# Altium PCB Zigbee控制板.PcbDoc
Units mm, origin at the board's own origin, x right, y up, seen from the top; angles counter-clockwise.
Board outline 100 x 75 mm, 2 copper layers (Top Layer, Bottom Layer); 54 components, 41 nets, 171 pads, 48 vias.
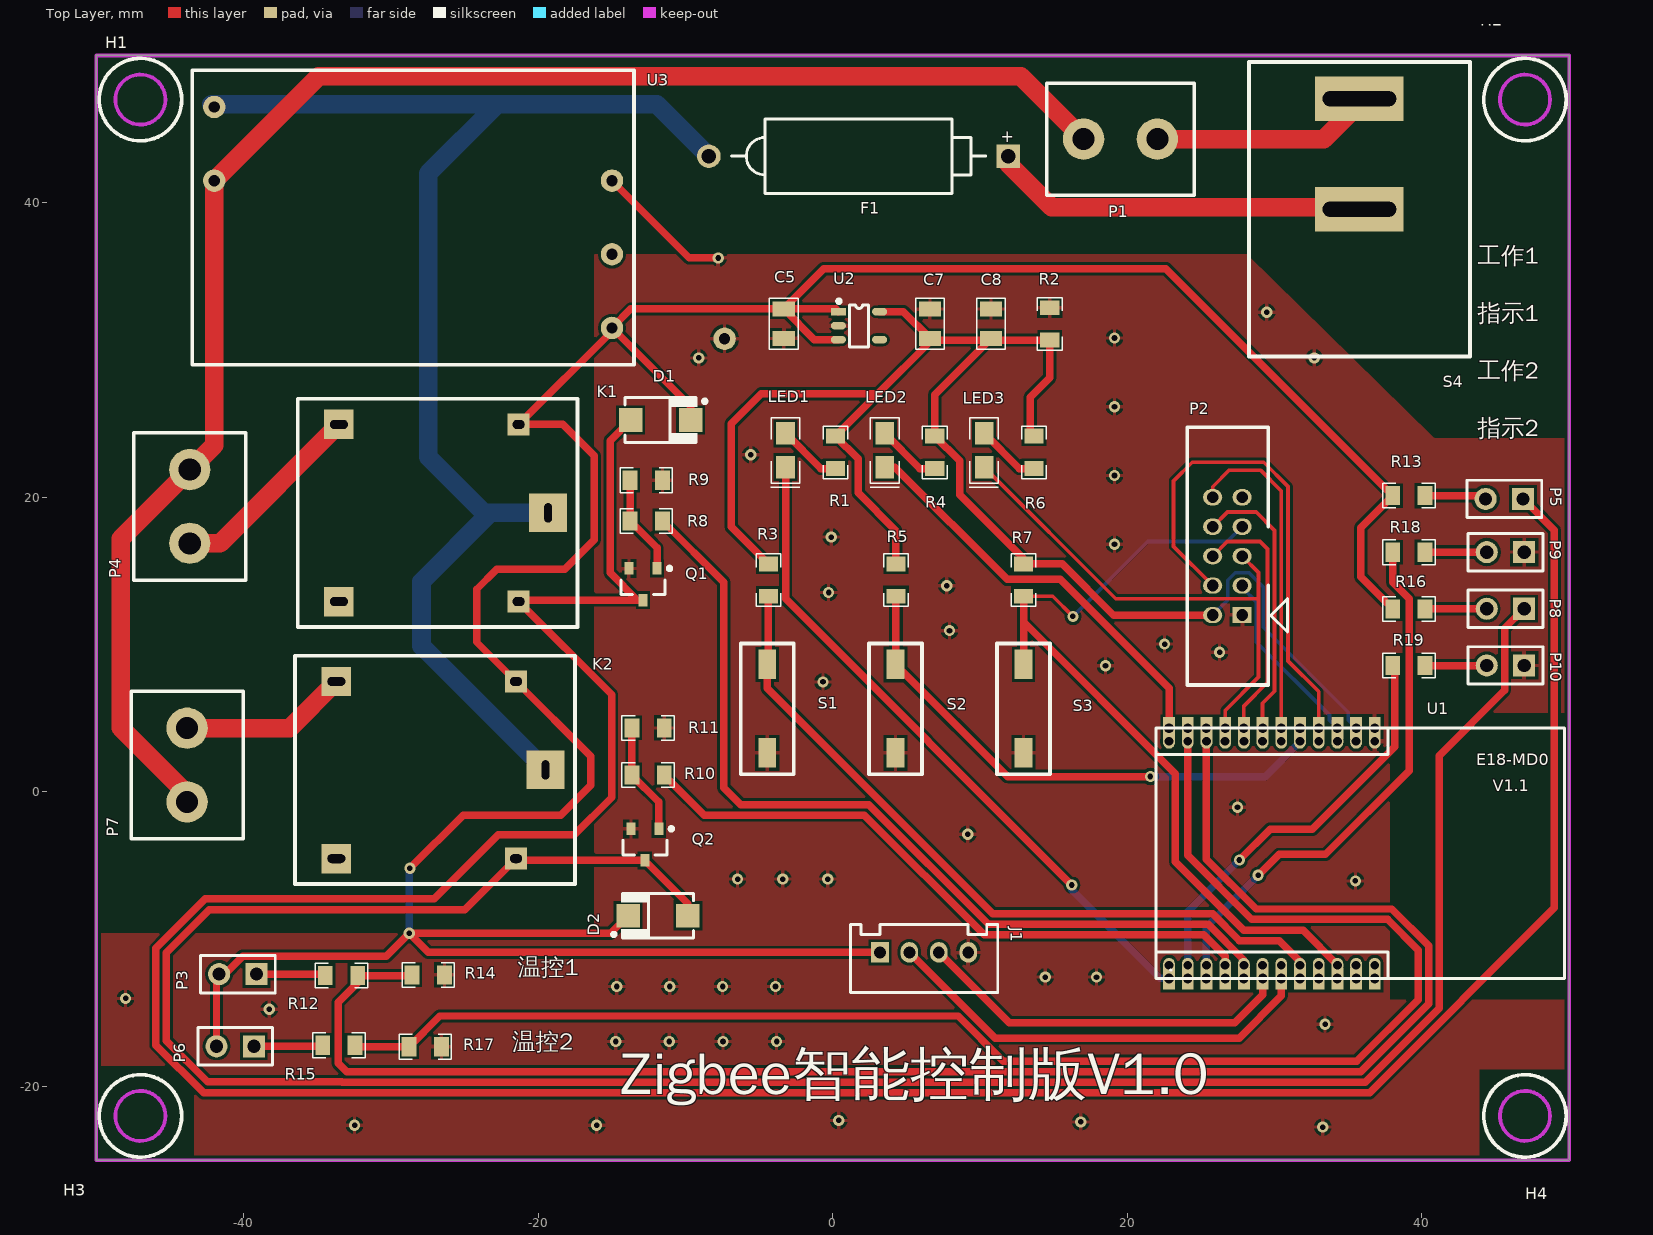
[diagram p0: Top Layer view]
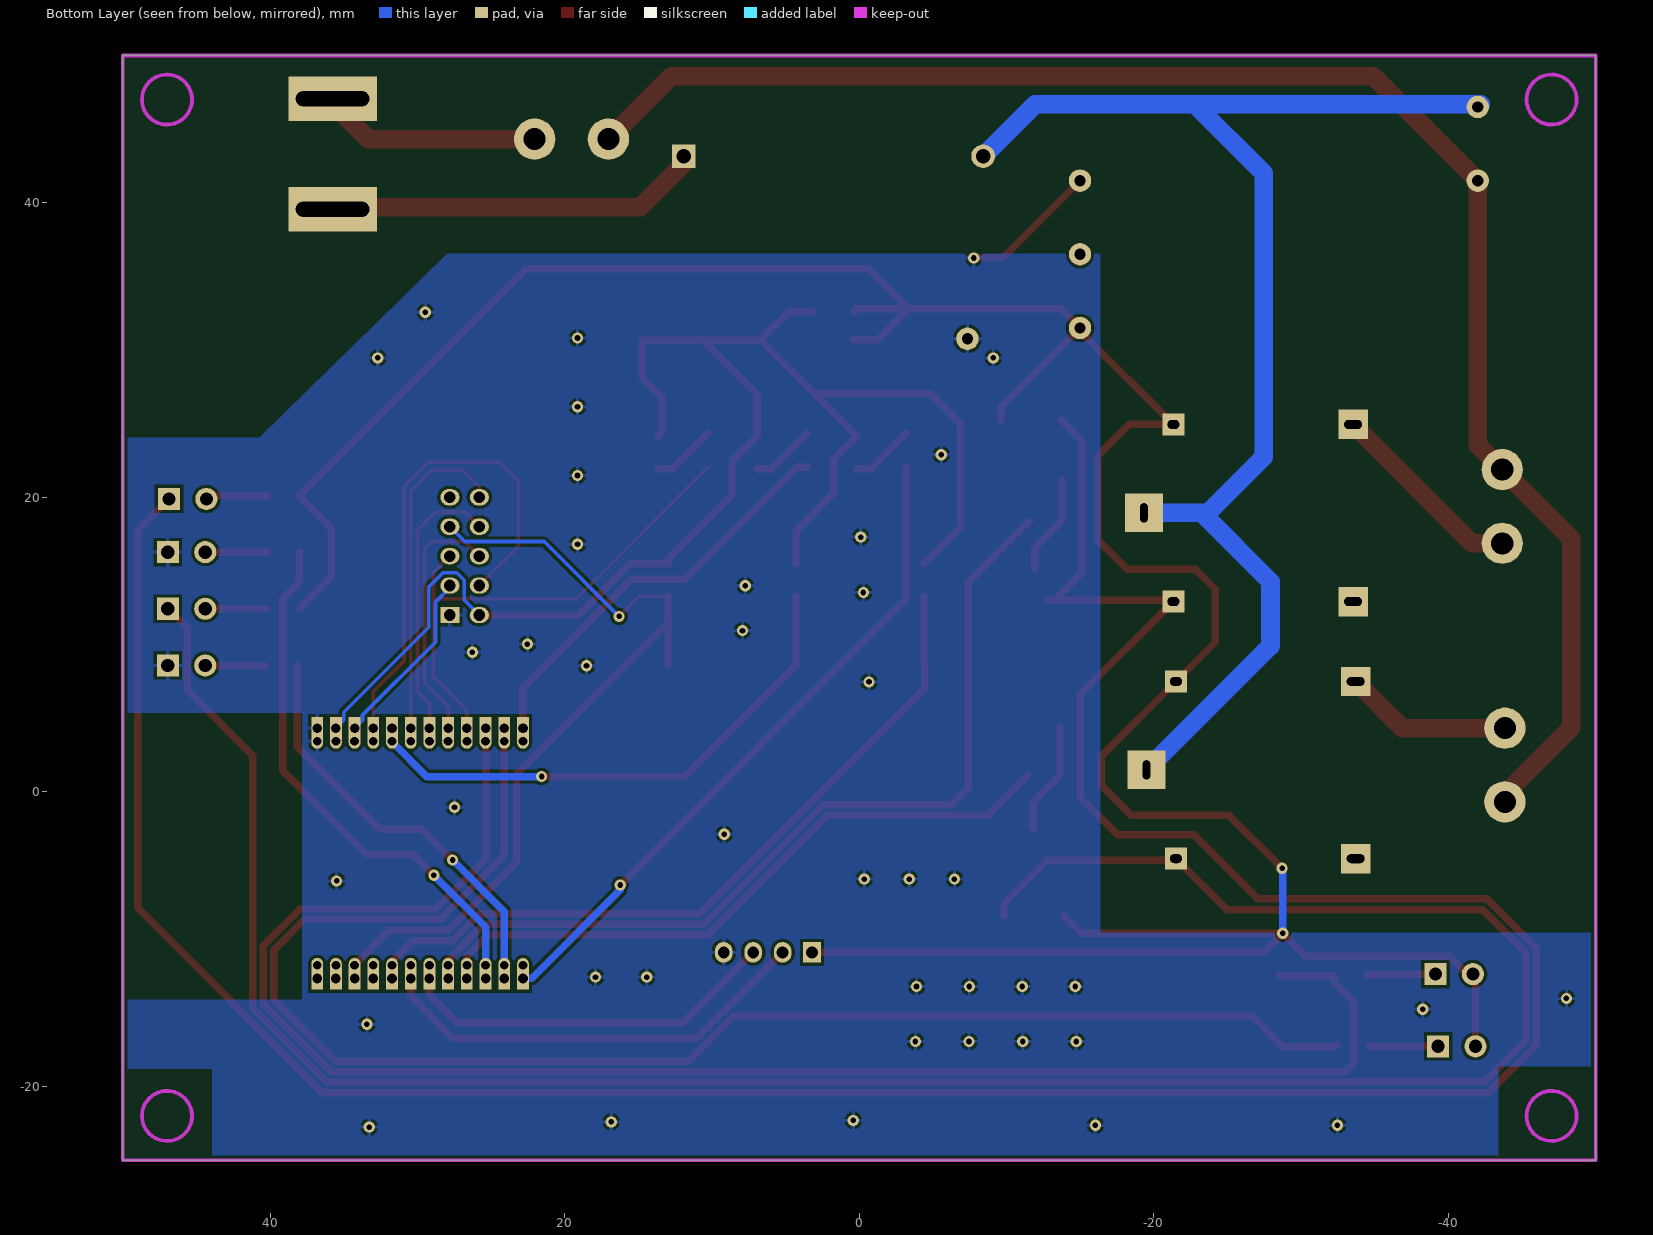
[diagram p1: Bottom Layer view, seen from below]

## Layer stack, top to bottom
Top Layer: signal copper 0.0356
Dielectric: dielectric 0.32, FR-4, Dk 4.8
Bottom Layer: signal copper 0.0356

## Board outline
-50,-25 -50,50 50,50 50,-25

## Design rules (kind name [scope] priority, off if disabled: settings)
Clearance mcu [InComponent('U2')] p1: gap=0.178
Clearance Clearance_1 [All] p2: gap=0.203
ComponentClearance [All] p1: gap=0 collisioncheckmode=3 verticalgap=0 showdistances=FALSE
HoleSize [All] p1: absolutevalues=TRUE maxlimit=5.08 minlimit=0.025 maxpercent=80.000 minpercent=20.000
MinimumSolderMaskSliver [All] p1: minsoldermaskwidth=0.127
PolygonConnect [All] p1: connectstyle=Relief reliefconductorwidth=0.254 reliefentries=4 polygonreliefangle="90 Angle"
RoutingVias [All] p1: holewidth=0.381 width=0.762 viastyle="Through Hole" minholewidth=0.051 minwidth=0.127 maxholewidth=0.381 maxwidth=0.762
ShortCircuit [All] p1: allowed=TRUE
SilkscreenOverComponentPads [All] p1 off: minsilkscreentomaskgap=0
SolderMaskExpansion [All] p1: expansion=0.102
Width [All] p1: maxlimit=2.54 minlimit=0.127 preferedwidth=0.254
23 further rules are at their usual default settings.

## Components (designator, comment, footprint, x,y, rotation, side; value= is the part's Value field where it differs from the comment)
C5 "1uF" C0805_M2013 -3.327,31.785 r90 top
C7 "10uF" C0805_M2013 6.609,31.785 r90 top
C8 "0.1uF" C0805_M2013 10.739,31.785 r90 top
D1 "SMA DO-214AC" "SMA DO-214AC" -11.684,25.248 r0 top
D2 "SMA DO-214AC" "SMA DO-214AC" -11.862,-8.407 r180 top
F1 "Fuse 1" POLAR0.8 1.753,43.155 r0 top
H1 "HOLE3.4-5.6" HOLE3.4-5.6 -47,47 r0 top
H2 "HOLE3.4-5.6" HOLE3.4-5.6 47,47 r0 top
H3 "HOLE3.4-5.6" HOLE3.4-5.6 -47,-22 r0 top
H4 "HOLE3.4-5.6" HOLE3.4-5.6 47,-22 r0 top
J1 "PH2.0-4P" PH2.0-4P 8.204,-10.897 r0 top
K1 "Relay-SPDT-L" Relay-SPDT-L -36.322,26.695 r0 top
K2 "Relay-SPDT-L" Relay-SPDT-L -36.5,9.246 r0 top
LED1 "LED-R" 0805_LED -3.2,23.19 r270 top
LED2 "LED-R" 0805_LED 3.539,23.19 r270 top
LED3 "LED-R" 0805_LED 10.279,23.19 r270 top
P1 "Header 2" KF301-2P 24.536,40.513 r180 top
P2 "DC2-2.0-A-10P" DC3-2.0-A-10P 26.797,16.002 r90 top
P3 "Header 2" HDR1X2 -39.116,-12.37 r180 top
P4 "Header 2" KF301-2P -47.447,14.376 r90 top
P5 "Header 2" HDR1X2 46.863,19.888 r180 top
P6 "Header 2" HDR1X2 -39.294,-17.272 r180 top
P7 "Header 2" KF301-2P -47.625,-3.175 r90 top
P8 "Header 2" HDR1X2 46.939,12.431 r180 top
P9 "Header 2" HDR1X2 46.939,16.277 r180 top
P10 "Header 2" HDR1X2 46.939,8.585 r180 top
Q1 "SOT-23" SOT-23-3 -12.878,14.097 r270 top
Q2 "SOT-23" SOT-23-3 -12.751,-3.581 r270 top
R1 "R0805_M2013" R0805_M2013 0.186,23.053 r270 top
R2 "1K" R0805_M2013 14.732,31.775 r270 top
R3 "R0805_M2013" R0805_M2013 -4.369,14.376 r270 top
R4 "R0805_M2013" R0805_M2013 6.925,23.053 r270 top
R5 "R0805_M2013" R0805_M2013 4.293,14.376 r270 top
R6 "R0805_M2013" R0805_M2013 13.665,23.053 r270 top
R7 "R0805_M2013" R0805_M2013 12.954,14.376 r270 top
R8 "1K" R0805_M2013 -12.656,18.39 r0 top
R9 "10K" R0805_M2013 -12.656,21.158 r180 top
R10 "1K" R0805_M2013 -12.529,1.143 r0 top
R11 "10K" R0805_M2013 -12.529,4.343 r180 top
R12 "R0805_M2013" R0805_M2013 -33.35,-12.471 r180 top
R13 "R0805_M2013" R0805_M2013 39.116,20.117 r0 top
R14 "R0805_M2013" R0805_M2013 -27.457,-12.421 r180 top
R15 "R0805_M2013" R0805_M2013 -33.528,-17.196 r180 top
R16 "R0805_M2013" R0805_M2013 39.116,12.425 r0 top
R17 "R0805_M2013" R0805_M2013 -27.661,-17.297 r180 top
R18 "R0805_M2013" R0805_M2013 39.116,16.271 r0 top
R19 "R0805_M2013" R0805_M2013 39.116,8.585 r0 top
S1 "SW-PB" SW-KEY -2.642,9.652 r270 top
S2 "SW-PB" SW-KEY 6.058,9.652 r270 top
S3 "SW-PB" SW-KEY 14.757,9.652 r270 top
S4 "SW-SPST" SW-SHIP 43.256,49.555 r270 top
U1 "ZigbeeCC2530Core" CC2530_CORE 35.357,-2.311 r0 top
U2 "XC6503D331" SOT23-5 1.784,31.648 r0 top
U3 "220AC-5DC" 220AC-5DC -43.485,48.997 r0 top

## Footprints (in the part's own frame and the unit in brackets; to place one, negate y for a bottom-side part, rotate by r counter-clockwise, add the part's x,y. Pads: shape width x height; smd on the part's side, far side on the other; paste and mask are expansions set on the pad)
220AC-5DC [mil]
  round 60 hole 30: 1(59.06,-98.43) 2(59.06,-295.28) 3(1122.05,-295.28) 4(1122.05,-492.13) 5(1122.05,-688.98)
  silkscreen extent 0,-787 1181,0
0805_LED [mil]
  rect 60x50 smd: 1(-45,0) 2(45,0)
  silkscreen extent -88,-39 98,38
C0805_M2013 [mm] "Chip Capacitor, 2-Leads, Body 2.0x1.3mm, IPC"
  rect 1x1.5 smd: 1(-1,0) 2(1,0)
  silkscreen extent -1.72,-0.97 1.73,0.97
CC2530_CORE [mm]
  oval 0.8x1 hole 0.6: 1(1.445,5.745) 2(0.175,5.745) 3(-1.095,5.745) 4(-2.365,5.745) 5(-3.635,5.745) 6(-4.905,5.745) 7(-6.175,5.745) 8(-7.445,5.745) 9(-8.715,5.745) 10(-9.985,5.745) 11(-11.255,5.745) 12(-12.525,5.745) 13(-12.525,-9.455) 14(-11.255,-9.455) 15(-9.985,-9.455) 16(-8.715,-9.455) 17(-7.445,-9.455) 18(-6.175,-9.455) 19(-4.905,-9.455) 20(-3.635,-9.455) 21(-2.365,-9.455) 22(-1.095,-9.455) 23(0.175,-9.455) 24(1.445,-9.455)
  rect 0.8x1.5 hole 0.65: 1(1.445,6.645) 2(0.175,6.645) 3(-1.095,6.645) 4(-2.365,6.645) 5(-3.635,6.645) 6(-4.905,6.645) 7(-6.175,6.645) 8(-7.445,6.645) 9(-8.715,6.645) 10(-9.985,6.645) 11(-11.255,6.645) 12(-12.525,6.645) 13(-12.525,-10.355) 14(-11.255,-10.355) 15(-9.985,-10.355) 16(-8.715,-10.355) 17(-7.445,-10.355) 18(-6.175,-10.355) 19(-4.905,-10.355) 20(-3.635,-10.355) 21(-2.365,-10.355) 22(-1.095,-10.355) 23(0.175,-10.355) 24(1.445,-10.355)
  Top Layer lines w0.22: -12.409,-9.785 ccw(c-12.409,-9.751) -12.385,-9.775
  silkscreen extent -13.42,-10.35 14.33,6.65
DC3-2.0-A-10P [mm]
  rect 1.1x1.3 hole 0.8: 1(-4,-1)
  oval 1.1x1.3 hole 0.8: 2(-4,1) 3(-2,-1) 4(-2,1) 5(0,-1) 6(0,1) 7(2,-1) 8(2,1) 9(4,-1) 10(4,1)
  silkscreen extent -8.75,-4.08 8.75,2.73
HDR1X2 [mm] "Connector; Header; 2 Positi"
  rect 1.5x1.5 hole 0.9: 1(0,0)
  round 1.5 hole 0.9: 2(2.54,0)
  silkscreen extent -1.27,-1.27 3.81,1.27
HOLE3.4-5.6 [mm]
  Keep-Out Layer circle w0.254: c0,0 r1.7
  silkscreen extent -2.8,-2.8 2.8,2.8
KF301-2P [mm]
  round 2.8 hole 1.5: 1(2.5,-3.8) 2(7.5,-3.8)
  silkscreen extent 0,-7.6 10,0
PH2.0-4P [mm]
  rect 1.2x1.4 hole 0.8: 1(-5,0)
  oval 1.2x1.4 hole 0.8: 2(-3,0) 3(-1,0) 4(1,0)
  silkscreen extent -7.01,-2.72 3,1.88
POLAR0.8 [mm] "Polarized Capacitor; 2 Lea"
  rect 1.6x1.6 hole 1: 1(10.16,0)
  round 1.6 hole 1: 2(-10.16,0)
  silkscreen extent -8.64,-2.54 8.64,2.54
R0805_M2013 [mm]
  rect 1x1.3 smd: 1(-1.1,0) 2(1.1,0)
  silkscreen extent -1.78,-0.84 1.78,0.84
Relay-SPDT-L [mm]
  rect 1.5x1.5 hole 0.6 slot 0.8 at 0 deg: 1(15,-13.775) 2(15,-1.75)
  rect 2.6x2.6 hole 0.5 slot 1.3 at 90 deg: 3(17,-7.75)
  rect 2x2 hole 0.6 slot 1.2 at 0 deg: 4(2.8,-1.75) 5(2.8,-13.775)
  silkscreen extent 0,-15.5 19,0
"SMA DO-214AC" [mm]
  rect 1.6x1.6 smd: 1(-2.032,0) 2(2.032,0)
  silkscreen extent -2.41,-1.52 3.12,1.52
SOT23-5 [mil] "SOT23, 5-Leads, Body 3.1x3.0mm (max), Pitch 0.95mm, IPC Medium Dens"
  rect 40x20 smd: 1(-55,37.4)
  oval 40x20 smd: 2(-55,0) 3(-55,-37.4) 4(55,-37.4) 5(55,37.4)
  silkscreen extent -59,-57 26,70
SOT-23-3 [mm] "SOT23, 3-Leads, Body 2.9x1.3mm, Pitch 0.95mm, Lead Span 2.5mm, IPC High"
  rect 0.85x0.6 smd: 1(-1.075,0.95) 2(-1.075,-0.95) 3(1.075,0)
  silkscreen extent -1.2,-1.5 0.7,1.93, body extent -0.7,-1.5 0.7,1.5, height 1.1
SW-KEY [mm] "RESE"
  rect 2x1.2 smd: 1(1,-1.8) 2(7,-1.8)
  silkscreen extent -0.43,-3.6 8.45,0
SW-SHIP [mm] "´"
  rect 3x6 hole 1 slot 5 at 90 deg: 1(2.5,-7.5) 2(10,-7.5)
  silkscreen extent 0,-15 20,0

## Part data
C5 C7 C8: library part Cap, "Capacitor"
D1 D2: library part SS14, "1.0 A Schottky Barr"
F1: "Fuse"
J1: library part "Header 4", "Header, 4-"
K1 K2: "Single-Pole Dual-Throw Relay"
P1 P4 P7: "Header, 2-"
P3 P5 P6 P8 P9 P10: "Header, 2-Pin"
Q1 Q2: library part NPN, "NPN Bipolar Transistor"
R2 R8 R9 R10 R11: library part Res1
S1 S2 S3: "Switch"
S4: "Single-Pole, Single-Throw Switch"
U1: library part ZigbeeCC2
U2: library part XC6503Dxxx
U3: "220VAC"

## Free pads (board coordinates)
  round 1.524 hole 0.762: 1(-7.341,30.759)

## Via types
v1: diameter 0.762, hole 0.381, Top Layer to Bottom Layer, tented bottom, 26 vias
v2: diameter 0.762, hole 0.381, Top Layer to Bottom Layer, tented both sides, 22 vias

## Nets (pads, with @x,y where several pads share a name; then routed paths per layer and width w, separated by ;. In a path a pad name is that pad's centre, name@x,y a point inside that pad or via, vN(x,y) a via of type N, cw(c..) or ccw(c..) an arc to the next point about the centre after c; other vN are vias at no path point)
AC_L: F1.2 K1.3 K2.3 U3.1 | length 95.7
  Bottom Layer w1.27: U3.1 -42.173,46.685 -20.65,46.685 ; -23.67,18.945 -27.457,22.733 -27.457,31.928 -27.457,41.986 -22.758,46.685 -11.938,46.685 F1.2 ; K2.3 -27.915,9.91 -27.915,14.275 -23.244,18.945 K1.3
AC_N: P1.2 P4.2 P7.1 U3.2 | length 110.4
  Top Layer w1.27: P7.1 -43.825,-0.151 -48.336,4.36 -48.336,17.187 P4.2 -41.985,23.539 U3.2 -34.891,48.59 12.759,48.59 P1.2
CTRL_1: R8.2 U1.17 | length 60.3
  Top Layer w0.508: R8.2 -7.391,14.225 -7.391,0.279 -6.248,-0.864 2.449,-0.864 10.577,-8.992 25.491,-8.992 27.912,-11.412 U1.17@27.912,-11.766
CTRL_2: R10.2 U1.16 | length 43.8
  Top Layer w0.508: R10.2 -8.711,-1.575 2.154,-1.575 10.282,-9.703 25.197,-9.703 26.642,-11.148 U1.16@26.642,-11.766
GND: C5.1 C7.2 C8.2 J1.4 P2.1 P9.1 P10.1 pad.1 Q1.2 Q2.2 R2.1 R9.1 R11.1 R14.1 R17.1 S1.2 S2.2 S3.2 U1.1 U2.2 U3.3 | length 9.4
  Top Layer w0.508: U3.3 -9.734,36.246 v1(-7.772,36.246)
  other v1: 33.274,-22.758 -32.461,-22.631 -16.027,-22.631 16.84,-22.403 0.406,-22.301 -14.732,-16.942 -11.091,-16.942 -7.451,-16.942 -3.81,-16.942 33.426,-15.773 -38.252,-14.757 -48.006,-14.021 -14.656,-13.208 -11.066,-13.208 -7.476,-13.208 -3.886,-13.208 18.517,8.56 -5.563,22.885
  other v2: 14.427,-12.573 17.907,-12.573 35.484,-6.045 -6.46,-5.918 -3.395,-5.918 -0.33,-5.918 9.169,-2.87 27.483,-1.041 -0.66,7.468 26.264,9.474 22.53,10.033 7.925,10.947 -0.279,13.538 7.747,13.995 19.126,16.815 -0.102,17.297 19.126,21.48 19.126,26.145 -9.093,29.464 32.69,29.464 19.126,30.81 29.464,32.563
LED1: LED1.2 U1.13 | length 45.8
  Top Layer w0.508: LED1.2 -3.2,13.106 v1(16.231,-6.325)
  Bottom Layer w0.508: v1(16.231,-6.325) 16.231,-6.655 22.242,-12.666 U1.13@22.832,-12.666
LED2: LED2.2 U1.12 | length 29.1
  Top Layer w0.508: LED2.2 4.216,22.047 11.836,14.427 15.443,14.427 22.832,7.039 U1.12@22.832,3.434
NetD1_1: D1.1 K1.1 P5.1 Q1.3 | length 209.8
  Top Layer w0.508: D1.1 -15.113,23.851 -15.113,14.872 -13.263,13.022 ; Q1.3 -13.263,13.022 ; P5.1 48.997,17.755 48.997,-7.869 36.444,-20.422 -42.713,-20.422 -45.949,-17.186 -45.949,-10.627 -42.586,-7.264 -27.051,-7.264 -22.708,-2.921 -17.551,-2.921 -15.011,-0.381 -15.011,6.61 K1.1 -21.22,13.022 -13.263,13.022
NetD2_1: D2.1 K2.1 P8.1 Q2.3 | length 165.3
  Top Layer w0.508: D2.1 -9.83,-7.577 Q2.3 -21.373,-4.656 K2.1 -24.971,-8.001 -42.316,-8.001 -45.237,-10.922 -45.237,-16.891 -42.443,-19.685 -33.315,-19.685 -33.289,-19.71 36.149,-19.71 41.173,-14.686 41.173,2.464 45.606,6.897 45.606,11.098 P8.1
NetF1_1: F1.1 S4.2 | length 26
  Top Layer w1.27: F1.1 11.913,42.647 14.877,39.682 S4.2@36.213,39.682
NetK1_4: K1.4 P4.1 | length 13.5
  Top Layer w1.27: P4.1 -41.591,16.876 K1.4
NetK2_4: K2.4 P7.2 | length 11.4
  Top Layer w1.27: P7.2 -36.87,4.325 K2.4
NetLED1_1: LED1.1 R1.2 | length 4.4
  Top Layer w0.508: LED1.1 -0.82,21.953 R1.2
NetLED2_1: LED2.1 R4.2 | length 4.4
  Top Layer w0.508: LED2.1 5.92,21.953 R4.2
NetLED3_1: LED3.1 R6.2 | length 4.4
  Top Layer w0.508: LED3.1 12.659,21.953 R6.2
NetP1_1: P1.1 S4.1 | length 15.4
  Top Layer w1.27: P1.1 33.344,44.313 S4.1@36.213,47.182
NetP3_1: P3.1 R12.2 | length 4.7
  Top Layer w0.508: P3.1 -34.552,-12.37 R12.2
NetP5_2: P5.2 R13.2 | length 4.2
  Top Layer w0.508: R13.2 44.094,20.117 P5.2
NetP6_1: P6.1 R15.2 | length 4.7
  Top Layer w0.508: P6.1 -34.704,-17.272 R15.2
NetP8_2: P8.2 R16.2 | length 4.2
  Top Layer w0.508: R16.2@40.223,12.431 P8.2
NetP9_2: P9.2 R18.2 | length 4.2
  Top Layer w0.508: R18.2 40.223,16.277 P9.2
NetP10_2: P10.2 R19.2 | length 4
  Top Layer w0.508: R19.2@40.368,8.579 P10.2@44.393,8.579
NetQ1_1: Q1.1 R8.1 R9.2 | length 6.7
  Top Layer w0.508: R9.2 R8.1 -11.928,16.562 Q1.1
NetQ2_1: Q2.1 R10.1 R11.2 | length 7.6
  Top Layer w0.508: R11.2 R10.1 -11.801,-0.685 Q2.1
P0.1/BTN1: R3.2 S1.1 U1.20 | length 50.3
  Top Layer w0.508: R3.2 -4.369,8.725 S1.1 -4.442,7.032 10.871,-8.28 25.786,-8.28 27.615,-10.109 30.302,-10.109 U1.20@31.841,-11.648
P1.4/CSN: LED3.2 P2.5 U1.9 | length 36.3
  Top Layer w0.254: LED3.2 19.22,13.106 28.905,13.106 ; U1.9@26.642,3.434 26.642,4.334 26.642,5.534 28.905,7.798 28.905,14.894 P2.5
P1.5/SCLK: P2.6 U1.8 | length 17.2
  Top Layer w0.254: P2.6 26.788,16.993 29.007,16.993 29.515,16.485 29.515,7.442 27.912,5.839 U1.8@27.912,4.334
P1.6/MOSI: P2.8 U1.7 | length 18.9
  Top Layer w0.254: P2.8 26.794,18.999 28.753,18.999 29.997,17.755 29.997,6.833 29.182,6.017 U1.7@29.182,4.334
P1.7/MISO: P2.10 U1.6 | length 22.5
  Top Layer w0.254: P2.10 25.797,20.717 26.924,21.844 29.032,21.844 30.455,20.422 30.455,4.336 U1.6@30.452,4.334
P2.0/BTN2: R5.2 S2.1 U1.5 | length 36.3
  Top Layer w0.508: R5.2 4.293,8.687 S2.1 11.869,1.041 v1(21.565,1.041)
  Bottom Layer w0.508: v1(21.565,1.041) 29.372,1.041 31.722,3.391 U1.5@31.722,3.434
P2.1/DD: P2.4 U1.4 | length 34.4
  Top Layer w0.254: P2.4 23.139,16.66 23.139,21.107 24.409,22.377 29.261,22.377 30.912,20.726 30.912,8.887 32.992,6.807 U1.4@32.992,4.334
P2.2/DC: P2.3 U1.3 | length 12.3
  Bottom Layer w0.254: P2.3 27.797,13.863 28.777,12.882 28.777,10.165 33.722,5.22 33.722,4.873 U1.3@34.262,4.334
PWR_LED_1: R18.1 U1.15 | length 36
  Top Layer w0.508: v1(28.88,-5.664) 30.302,-4.242 33.452,-4.242 39.126,1.432 39.126,13.112 38.016,14.221 R18.1
  Bottom Layer w0.508: U1.15@25.372,-11.766 25.372,-9.172 v1(28.88,-5.664)
PWR_LED_2: R19.1 U1.14 | length 27.9
  Top Layer w0.508: v1(27.61,-4.623) 29.693,-2.54 32.563,-2.54 38.168,3.066 R19.1@38.168,8.579
  Bottom Layer w0.508: U1.14@24.102,-11.766 24.102,-8.131 v1(27.61,-4.623)
RESET: P2.7 R7.2 S3.1 U1.22 | length 57
  Top Layer w0.254: R7.2 14.943,13.276 v1(16.307,11.913)
  Top Layer w0.508: R7.2 12.954,11.532 ; S3.1 12.954,8.655 12.954,11.532 ; U1.22@34.262,-11.766 34.262,-11.724 31.936,-9.398 27.909,-9.398 23.266,-4.755 23.266,1.219 12.954,11.532
  Bottom Layer w0.254: v1(16.307,11.913) 21.387,16.993 26.788,16.993 P2.7
SEN_1_IN: R12.1 R14.2 U1.10 | length 115.9
  Top Layer w0.508: R14.2 -28.608,-12.471 R12.1 -32.25,-12.962 -33.579,-14.291 -33.579,-18.415 -32.995,-18.999 35.855,-18.999 40.462,-14.392 40.462,-10.45 37.963,-7.95 28.743,-7.95 25.372,-4.579 U1.10@25.372,3.434
SEN_2_IN: R15.1 R17.2 U1.11 | length 105.5
  Top Layer w0.508: R15.1 -32.326,-17.297 R17.2 -26.678,-15.215 8.516,-15.215 11.59,-18.288 35.56,-18.288 39.751,-14.097 39.751,-10.744 37.668,-8.661 28.448,-8.661 24.102,-4.315 U1.11@24.102,3.434
UART_RX: J1.3 U1.18 | length 25.8
  Top Layer w0.508: J1.3 11.979,-15.672 27.28,-15.672 29.182,-13.77 U1.18@29.182,-12.666
UART_TX: J1.2 U1.19 | length 30
  Top Layer w0.508: J1.2 11.021,-16.713 27.584,-16.713 30.452,-13.846 U1.19@30.452,-12.666
VCC-3.3V: C7.1 C8.1 P2.2 R1.1 R2.2 R3.1 R4.1 R5.1 R6.1 R7.1 U1.2 U2.5 | length 112.2
  Top Layer w0.508: R3.1 -6.883,17.991 -6.883,24.994 -4.844,27.033 3.066,27.033 ; U2.5 4.795,32.598 C7.1 ; R5.1 4.293,17.729 1.727,20.295 1.727,22.611 R1.1 3.066,27.033 ; C8.1 C8.1@10.63,30.675 ; R6.1 13.411,24.407 13.411,26.797 14.732,28.118 R2.2 C8.1@10.63,30.675 ; P2.2 19.062,12.002 15.588,15.476 R7.1 12.954,15.824 8.611,20.168 8.611,22.468 R4.1 6.925,26.971 C8.1@10.63,30.675 ; 3.066,27.033 6.609,30.576 C7.1 ; C7.1 6.718,30.675 C8.1@10.63,30.675
  Bottom Layer w0.254: P2.2 26.817,13.022 26.817,14.367 27.332,14.882 28.262,14.882 29.234,13.909 29.234,11.171 34.992,5.414 34.992,4.873 U1.2@35.532,4.334
VCC-5V: C5.2 D1.2 D2.2 J1.1 K1.2 K2.2 P3.2 P6.2 R13.1 R16.1 U2.1 U2.3 U3.5 | length 220.1
  Top Layer w0.508: P6.2 -41.834,-12.548 P3.2 -41.263,-12.37 -40.055,-11.163 -30.314,-11.163 v1(-28.753,-9.601) ; v1(-28.702,-5.182) -25.095,-1.575 -18.466,-1.575 -16.434,0.457 -16.434,2.43 K2.2 -24.181,10.177 -24.181,13.741 -22.809,15.113 -18.186,15.113 -16.18,17.12 -16.18,22.809 -18.316,24.945 K1.2 -14.985,31.283 U3.5 ; D2.2 -15.088,-9.601 v1(-28.753,-9.601) ; D1.2 -9.652,26.164 U3.5 ; U2.3 -1.241,30.698 C5.2 ; U2.1 0.201,32.785 C5.2 ; J1.1 -27.457,-10.897 v1(-28.753,-9.601) ; R16.1 35.839,14.601 35.839,17.94 R13.1 22.624,35.509 -0.603,35.509 C5.2 ; U3.5 -13.697,32.785 C5.2
  Bottom Layer w0.508: v1(-28.753,-9.601) -28.753,-5.232 v1(-28.702,-5.182)
pads on no net: K1.5 K2.5 P2.9 U1.21 U1.23 U1.24 U2.4 U3.4

## Polygon pours and split planes (outlines as drawn)
GND on Bottom Layer "Top Layer-No Net" (solid, remove dead copper, pour order 5): -16.361,36.497 -16.332,36.525 24.739,36.525 27.981,36.525 40.635,24.13 40.739,24.028 50.256,24.028 50.256,-26.899 50.775,-27.407 50.152,-26.797 -55.778,-26.797 -55.778,-9.677 -55.675,-9.576 -16.362,-9.576
GND on Top Layer "Top Layer-No Net" (solid, remove dead copper, pour order 6): -16.177,36.482 -16.148,36.51 24.875,36.51 28.112,36.51 40.752,24.115 40.855,24.013 50.361,24.013 50.361,-26.914 50.879,-27.422 50.257,-26.812 -55.547,-26.812 -55.547,-9.692 -55.444,-9.591 -16.178,-9.591

## Keep-outs
Keep-Out Layer:
  the board outline again, w0.254

## Other copper
Top Layer:
  pour cut-out: 37.821,5.359 37.821,-14.122 53.01,-14.122 53.01,5.232 53.137,5.359
  pour cut-out: -51.308,-18.593 -43.358,-18.593 -43.358,-26.111 -43.51,-26.264 -43.891,-25.883 -51.308,-25.883
  pour cut-out: 43.891,-18.821 51.841,-18.821 51.841,-26.34 51.689,-26.492 51.308,-26.111 43.891,-26.111
Bottom Layer:
  pour cut-out: 37.821,5.359 37.821,-14.122 53.01,-14.122 53.01,5.232 53.137,5.359
  pour cut-out: 43.917,-18.791 51.867,-18.791 51.867,-26.31 51.714,-26.462 51.333,-26.081 43.917,-26.081
  pour cut-out: -51.333,-18.639 -43.383,-18.639 -43.383,-26.157 -43.536,-26.31 -43.917,-25.929 -51.333,-25.929

## Silkscreen, mask and mechanical layers (free items; w line width, h text height)
Top Overlay:
  text "工作1" at 43.79,35.458 h2
  text "指示1" at 43.79,31.547 h2
  text "工作2" at 43.79,27.635 h2
  text "指示2" at 43.79,23.724 h2
  text "温控1" at -21.387,-12.852 h2
  text "温控2" at -21.766,-17.907 h2
  text "Zigbee智能控制版V1.0" at -14.376,-21.463 h5
Drill Drawing:
  text ".LEGEND" at 3.353,-61.011 h0.8
  text "100 * 75mm" at -29.235,-61.722 h0.8
  text "Drill Drawing." at 3.48,-64.313 h0.8

## Text inside footprints (layer, text, board x,y; h text height)
F1: Top Overlay "+" at 11.405,44.105 h0.8
U1: Top Overlay "E18-MD0" at 43.672,1.814 h0.8; Top Overlay "V1.1" at 44.802,0.044 h0.8